# Altium PCB PCB1.PcbDoc
Units mm, origin at the board's own origin, x right, y up, seen from the top; angles counter-clockwise.
Board outline 43.94 x 19.05 mm, 2 copper layers (Top Layer, Bottom Layer); 8 components, 6 nets, 25 pads, 4 vias.
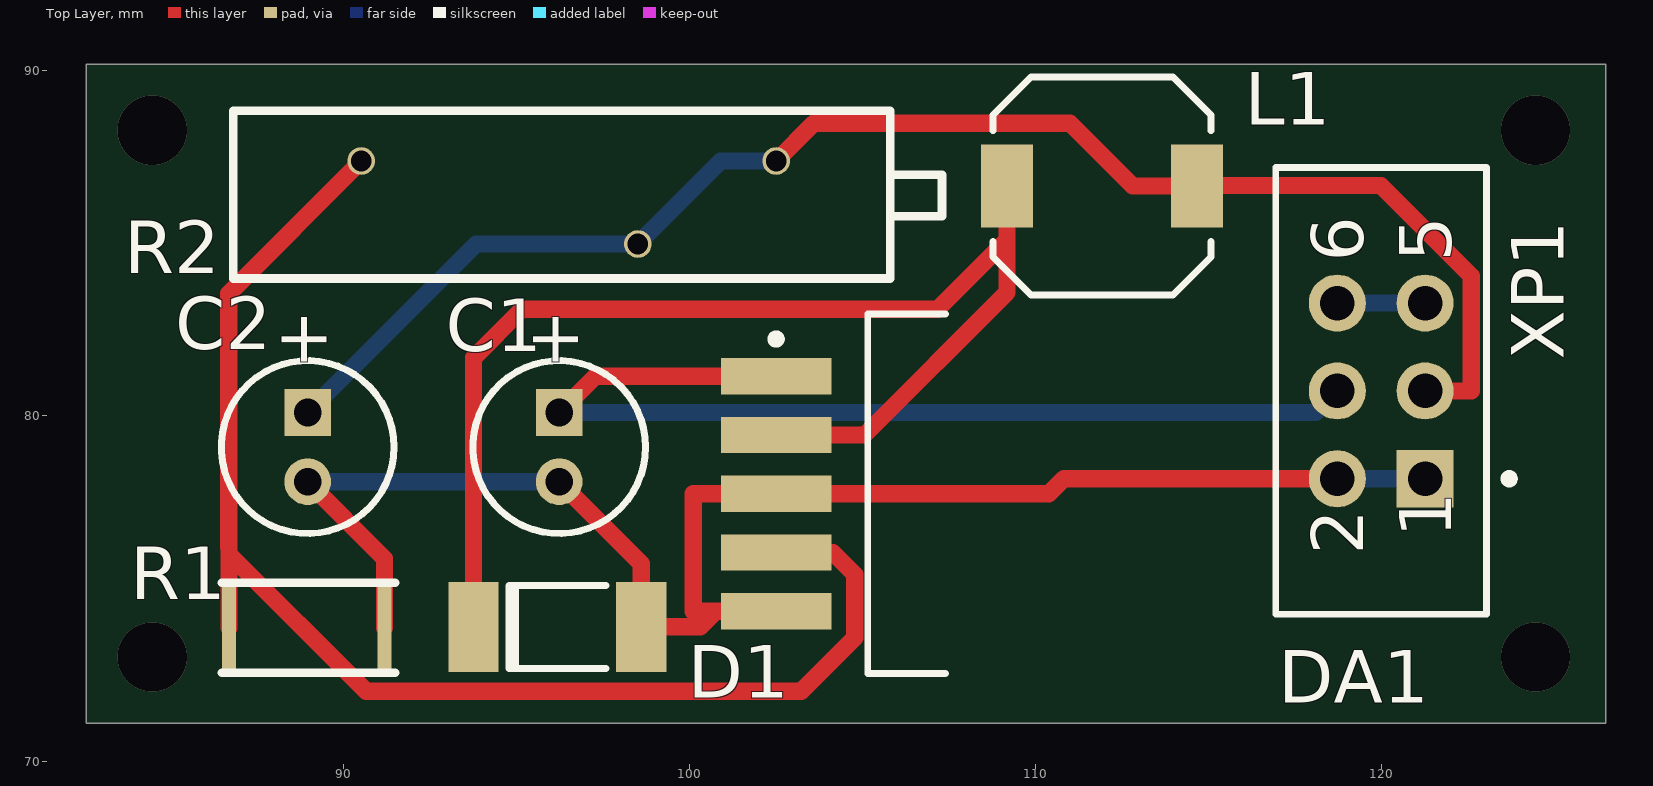
[diagram p0: Top Layer view]
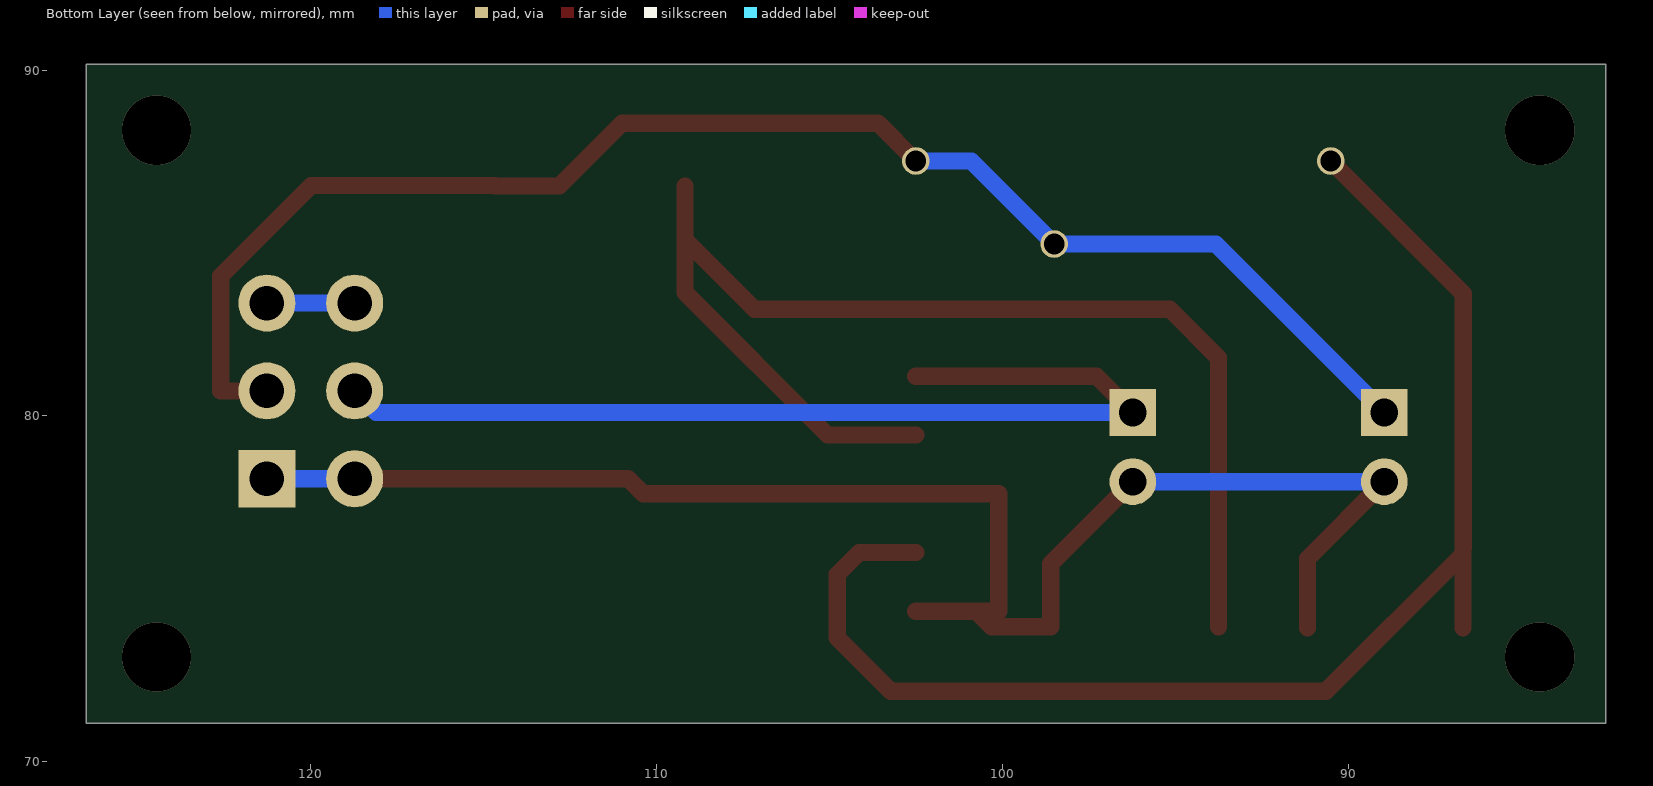
[diagram p1: Bottom Layer view, seen from below]

## Layer stack, top to bottom
Top Solder: solder mask 0.0102, Solder Resist, Dk 3.5
Top Layer: signal copper 0.0356
Dielectric 1: dielectric 0.32, FR-4, Dk 4.8
Bottom Layer: signal copper 0.0356
Bottom Solder: solder mask 0.0102, Solder Resist, Dk 3.5

## Board outline
82.55,71.12 126.492,71.12 126.492,90.17 82.55,90.17

## Design rules (kind name [scope] priority, off if disabled: settings)
Clearance [All] p1: gap=0.254
PolygonConnect [All] p1: connectstyle=Relief reliefconductorwidth=0.254 reliefentries=4 polygonreliefangle="90 Angle" airgapwidth=0.254
RoutingVias [All] p1: holewidth=0.711 width=1.27 viastyle="Through Hole" minholewidth=0.711 minwidth=1.27 maxholewidth=0.711 maxwidth=1.27
SolderMaskExpansion [All] p1: expansion=0.102
Width [All] p1: maxlimit=0.5 minlimit=0.5 preferedwidth=0.5
29 further rules are at their usual default settings.

## Components (designator, comment, footprint, x,y, rotation, side; value= is the part's Value field where it differs from the comment)
C1 "EKA00AA310D00" CAPPR2-5X11 96.225,79.1 r270 top
C2 "EKA00AA310D00" CAPPR2-5X11 88.95,79.1 r270 top
D1 "DL4733A" DL-41 96.175,73.9 r180 top
DA1 "LM2596S-3.3" TS5B_N 108.5,77.75 r0 top
L1 "B82462G4102M000" B82462G4 111.925,86.65 r0 top
R1 "1кОм" SMD2010 91.475,75.175 r180 top
R2 "10 кОм" "Reostat Bourns" 86.8,83.975 r0 top
XP1 "09 18 106 9421" 9181069421 120,80.725 r90 top

## Footprints (in the part's own frame and the unit in brackets; to place one, negate y for a bottom-side part, rotate by r counter-clockwise, add the part's x,y. Pads: shape width x height; smd on the part's side, far side on the other; paste and mask are expansions set on the pad)
9181069421 [mm] "Connector; IDC, PCB Transition - 2 Rows, Thru-Hole; 6 Position; Vertical; Pitch 2.54 mm; Body 12.92 x 6.1 x 7.45 mm (LxWxH), Kinked Contacts"
  rect 1.65x1.65 hole 1: 1(-2.54,-1.27)
  round 1.65 hole 1: 2(-2.54,1.27) 3(0,-1.27) 4(0,1.27) 5(2.54,-1.27) 6(2.54,1.27)
  silkscreen extent -6.46,-3.83 6.46,3.05, body extent -6.4,-2.95 6.4,3.05, height 7
B82462G4 [mm] "SM Inductor; 2 Leads; Body 6.3x6.3mm (LxW)"
  rect 1.5x2.4 smd: 1(-2.75,0) 2(2.75,0)
  silkscreen extent -3.15,-3.15 3.15,3.15, body extent -3.15,-3.15 3.15,3.15, height 3
CAPPR2-5X11 [mm] "Capacitor, Electrolytic, Radial; Body 5 x 11 mm (Dia.xH typ); Pin Spacing 2 mm (typ)"
  rect 1.35x1.35 hole 0.8: 1(-1,0)
  round 1.35 hole 0.8: 2(1,0)
  silkscreen extent -2.5,-2.5 2.5,2.5, body extent -2.48,-2.49 2.5,2.5, height 5
DL-41 [mm] "Metal Electrode Face (MELF) Diode; Body 5 x 2.4 mm (LxDia)"
  rect 1.45x2.6 smd: 1(-2.425,0) 2(2.425,0)
  silkscreen extent -1.4,-1.2 1.4,1.2, body extent -3.18,-1.52 3.18,1.48, height 2.8
"Reostat Bourns" [mm]
  round 0.8 hole 0.6: 1(3.7,3.4) 2(11.7,1) 3(15.7,3.4)
  silkscreen extent 0,0 20.5,4.85, body extent 0,0 19,4.85, height 7.35
SMD2010 [mm]
  rect 0.4x2.5 smd: 1(0.3,1.3) 2(4.8,1.3)
  silkscreen extent 0,0 5,2.6, body extent 0,0.05 5,2.55, height 0.55
TS5B_N [mm] "D2-PAK, 6-Leads, Body 8.6x10.2mm, Pitch 1.7mm, Lead Span 14.1mm, IPC Medium Density"
  rect 3.2x1.05 smd: 1(-6,3.4) 2(-6,1.7) 3(-6,0) 4(-6,-1.7) 5(-6,-3.4)
  rect 8.3x10.45 on Top Overlay: 6(3.45,0)
  silkscreen extent -6.12,-5.2 -1.1,5.2, body extent -3.35,-5.2 6.05,5.2, height 4.65

## Part data
C1 C2: "Aluminum Electrolytic Capacitor, Radial Style with Long Leads: 100uF, 16V"
D1: "Silicon Zener Diode"
DA1: "SIMPLE SWITCHER® Power Converter 150 KHz 3A Step-Down Voltage Regulator, 5-pin TO-263"
L1: "SMT Power Inductor; Size 6.3Ч6.3Ч3.0mm, ±20% Tolerance, 1uH, 3.4A"
R1: library part SMD_2010_1_kOm_1W, "Resistor"
R2: library part "10kOm trimmer reostat", "Resistor"
XP1: "Flat Cable Connector (IDC), PCB Transition Connector, 2 Rows, Kinked Solder Pin, 6 Contacts"

## Via types
v1: diameter 2, hole 2, Top Layer to Bottom Layer, 4 vias

## Nets (pads, with @x,y where several pads share a name; then routed paths per layer and width w, separated by ;. In a path a pad name is that pad's centre, name@x,y a point inside that pad or via, vN(x,y) a via of type N, cw(c..) or ccw(c..) an arc to the next point about the centre after c; other vN are vias at no path point)
GND: C1.2 C2.2 D1.1 DA1.3 DA1.5 R1.1 XP1.1 XP1.2 | length 47.1
  Top Layer w0.5: C2.2 91.175,75.875 R1.1 ; C1.2 98.6,75.725 D1.1 100.305,73.9 100.755,74.35 ; DA1.5 100.755,74.35 ; XP1.2 110.823,78.185 110.388,77.75 DA1.3 100.101,77.75 100.101,74.35 100.755,74.35
  Bottom Layer w0.5: C2.2 C1.2 ; XP1.2 XP1.1
NetC1_1: C1.1 DA1.1 XP1.4 | length 29.5
  Top Layer w0.5: C1.1 97.275,81.15 DA1.1
  Bottom Layer w0.5: C1.1 118.105,80.1 XP1.4
NetC2_1: C2.1 L1.2 R2.2 R2.3 XP1.3 | length 43.6
  Top Layer w0.5: R2.3 103.593,88.468 110.998,88.468 112.816,86.65 L1.2 114.675,86.665 119.99,86.665 122.606,84.049 122.606,80.725 XP1.3
  Bottom Layer w0.5: C2.1 93.825,84.975 R2.2 100.9,87.375 R2.3
NetD1_2: D1.2 DA1.2 L1.1 | length 36.1
  Top Layer w0.5: D1.2 93.75,81.685 95.148,83.083 107.168,83.083 109.175,85.09 ; DA1.2 105.056,79.45 109.175,83.569 109.175,85.09 ; L1.1 109.175,85.09
NetDA1_4: DA1.4 R1.2 R2.1 | length 40
  Top Layer w0.5: R1.2 86.675,76.19 ; R2.1 86.665,83.54 86.665,76.2 86.675,76.19 ; DA1.4 104.14,76.05 104.775,75.415 104.775,73.586 103.223,72.034 90.641,72.034 86.675,76 86.675,76.19
NetXP1_5: XP1.5 XP1.6 | length 2.5
  Bottom Layer w0.5: XP1.6 XP1.5
pads on no net: DA1.6
copper on no net:
  other v1: 84.455,73.025 124.46,73.025 84.455,88.265 124.46,88.265

## Text inside footprints (layer, text, board x,y; h text height)
C1: Top Overlay "+" at 95.475,83.075 h1.5 r270
C2: Top Overlay "+" at 88.2,83.075 h1.5 r270
XP1: Top Overlay "5" at 122.02,84.465 h1.5 r90; Top Overlay "6" at 119.48,84.465 h1.5 r90; Top Overlay "1" at 122.02,76.485 h1.5 r90; Top Overlay "2" at 119.48,75.985 h1.5 r90